# Altium PCB PCB2.PcbDoc
Units mil, origin at the board's own origin, x right, y up, seen from the top; angles counter-clockwise.
Board outline 6000 x 4000 mil, 2 copper layers (Top Layer, Bottom Layer); 47 components, 44 nets, 205 pads, 0 vias.
Unrouted connection lines stored in the file: 122.
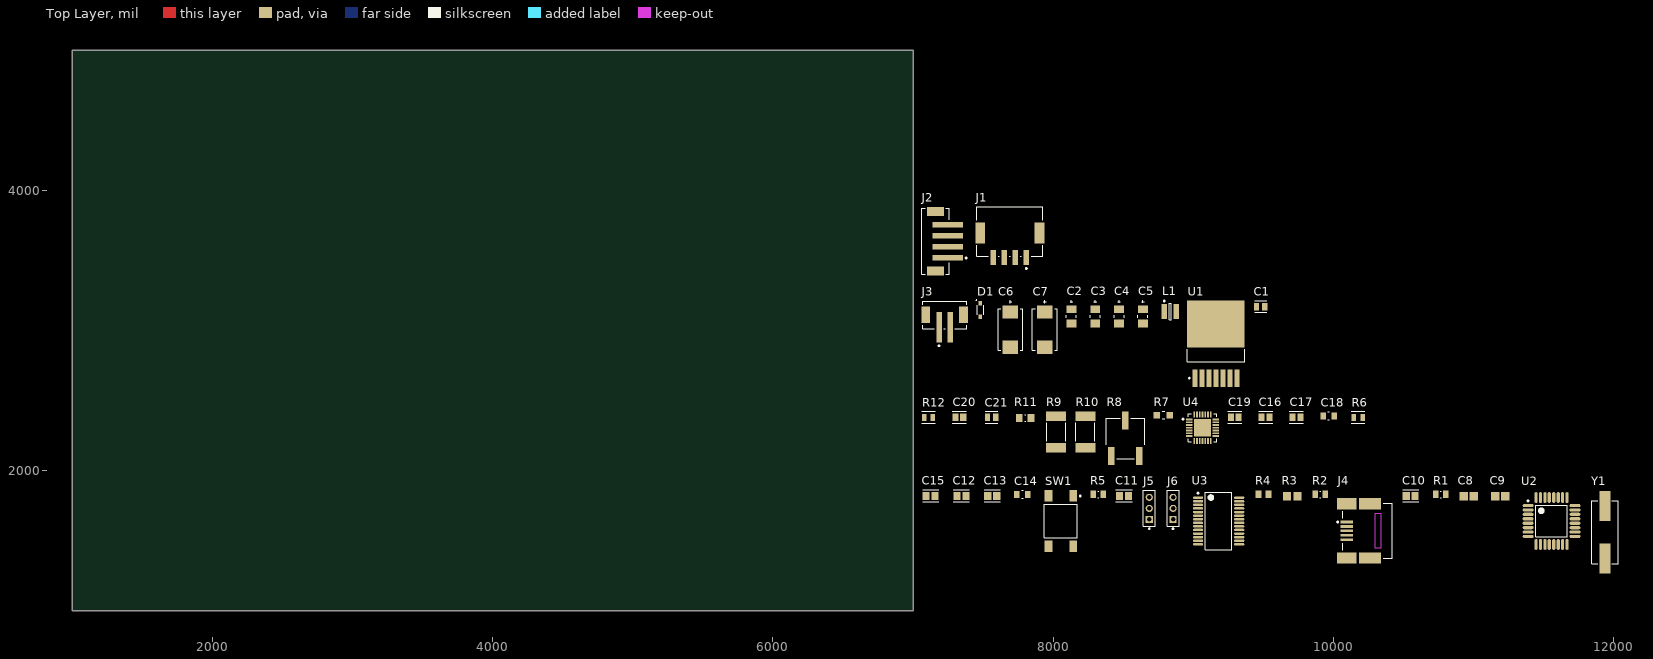
[diagram p0: Top Layer view]
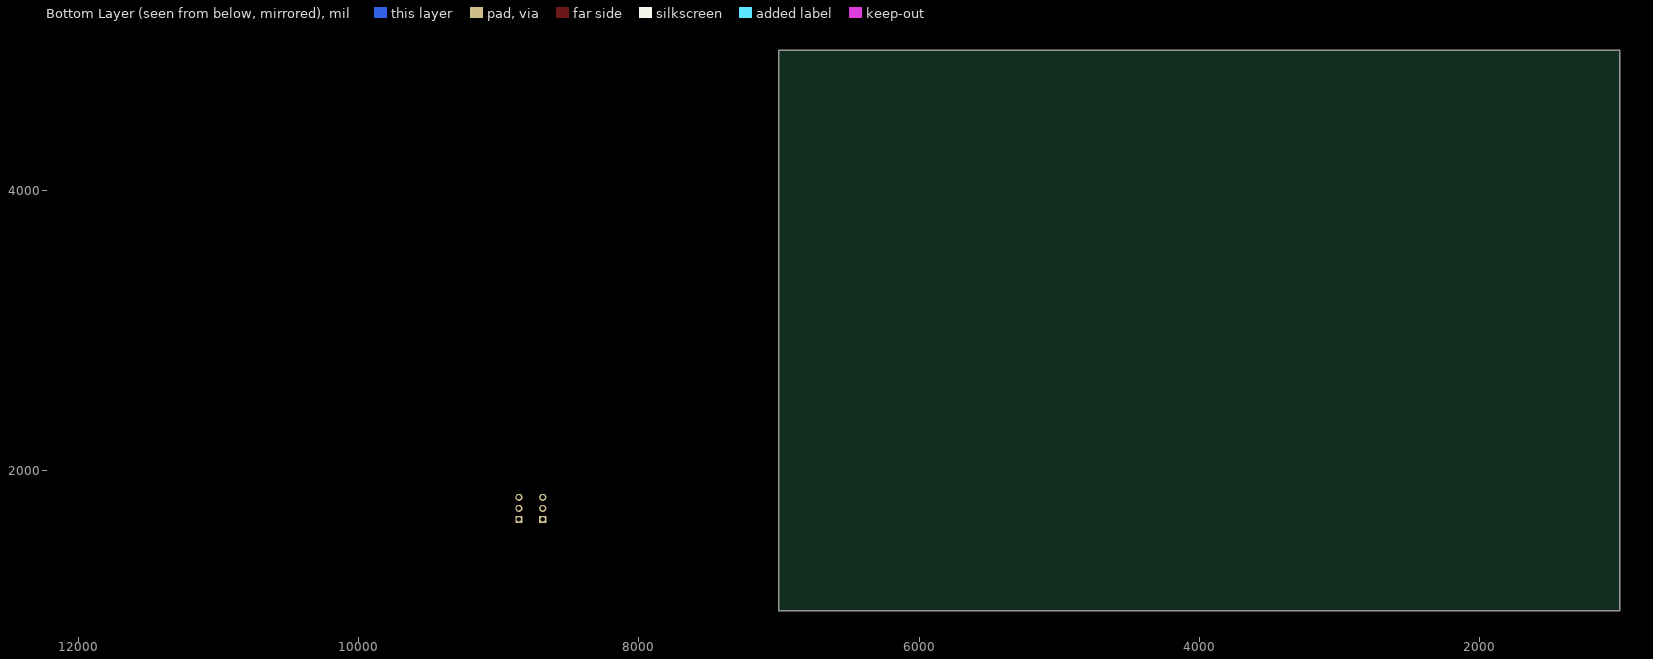
[diagram p1: Bottom Layer view, seen from below]

## Layer stack, top to bottom
Top Solder: solder mask 0.4, Solder Resist, Dk 3.5
Top Layer: signal copper 1.4
Dielectric 1: dielectric 12.6, FR-4, Dk 4.8
Bottom Layer: signal copper 1.4
Bottom Solder: solder mask 0.4, Solder Resist, Dk 3.5

## Board outline
1000,1000 7000,1000 7000,5000 1000,5000

## Design rules (kind name [scope] priority, off if disabled: settings)
Clearance [All] p1: gap=10 ignorepadtopadclearanceinfootprint=FALSE
PolygonConnect [All] p1: connectstyle=Relief reliefconductorwidth=10 reliefentries=4 polygonreliefangle="90 Angle" airgapwidth=10
RoutingVias [All] p1: holewidth=28 width=50 viastyle="Through Hole" minholewidth=28 minwidth=50 maxholewidth=28 maxwidth=50
SolderMaskExpansion [All] p1: expansion=4 istentingtop=FALSE
Width [All] p1: maxlimit=10 minlimit=10 preferedwidth=10
30 further rules are at their usual default settings.

## Classes and differential pairs
component class TOP: J1 J2
component class Designator: C1 C2 C3 C4 C5 C6 C7 D1 J3 L1 U1

## Components (designator, comment, footprint, x,y, rotation, side; value= is the part's Value field where it differs from the comment)
C1 "C0805C103K1RACTU" FP-C0805C-DN-MFG 9480,3170 r0 top value="10,000 pF"
C2 "TAJS156K006RNJ" FP-TAJS-MFG 8130,3100 r90 top
C3 "TAJS156K006RNJ" FP-TAJS-MFG 8300,3100 r90 top
C4 "TAJS156K006RNJ" FP-TAJS-MFG 8470,3100 r90 top
C5 "TAJS156K006RNJ" FP-TAJS-MFG 8640,3100 r90 top
C6 "EEFSX0D181ER" FP-SP-Cap-X-MFG 7695,3005 r90 top
C7 "EEFSX0D181ER" FP-SP-Cap-X-MFG 7940,3005 r90 top
C8 "08052U180GAT2A" CAPC2013X115X51ML20T26 10965,1815 r0 top value=18pF
C9 "08052U180GAT2A" CAPC2013X115X51ML20T26 11190,1815 r0 top value=18pF
C10 "08051C104KAT2A" FP-0805-L_2_01_0_2-W_1_25-IPC_B 10550,1820 r0 top
C11 "08051C104KAT2A" FP-0805-L_2_01_0_2-W_1_25-IPC_B 8505,1820 r0 top
C12 "08051C104KAT2A" FP-0805-L_2_01_0_2-W_1_25-IPC_B 7345,1820 r0 top
C13 "08051C104KAT2A" FP-0805-L_2_01_0_2-W_1_25-IPC_B 7565,1820 r0 top
C14 "0805YC475KAT2A" FP-0805-L_2_01_0_2-W_1_25-MFG 7780,1830 r0 top
C15 "08051C104KAT2A" FP-0805-L_2_01_0_2-W_1_25-IPC_B 7125,1820 r0 top
C16 "08055C104KAT2A" FP-0805-L_2_01_0_2-W_1_25-IPC_C 9515,2380 r0 top
C17 "08055C104KAT2A" FP-0805-L_2_01_0_2-W_1_25-IPC_C 9735,2380 r0 top
C18 "0805YC475KAT2A" FP-0805-L_2_01_0_2-W_1_25-MFG 9965,2390 r0 top
C19 "08055C104KAT2A" FP-0805-L_2_01_0_2-W_1_25-IPC_C 9295,2380 r0 top
C20 "08055C104KAT2A" FP-0805-L_2_01_0_2-W_1_25-IPC_C 7330,2380 r0 top
C21 "C0805C224K5RACTU" FP-C0805C-DN-MFG 7560,2380 r0 top value="0.22 μF"
D1 "BAS3010B-03W" INF-SOD323_V 7480,3145 r0 top
J1 "SM04B-PASS-TBT(LF)(SN)" FP-SM04B-PASS-TBT_LF_SN-MFG 7690,3705 r0 top
J2 "B4B-PH-SM4-TBT(LF)(SN)" FP-B4B-PH-SM4-TBT_LF_SN-MFG 7160,3635 r90 top
J3 "B2B-PH-SM4-TBT(LF)(SN)" FP-B2B-PH-SM4-TBT_LF_SN-MFG 7225,3110 r0 top
J4 "56579-0576" MOLX-56579-0576_V 10095,1570 r90 top
J5 "NRPN031PAEN-RC" FP-NRPN031PAEN-RC-MFG 8685,1730 r90 top
J6 "NRPN031PAEN-RC" FP-NRPN031PAEN-RC-MFG 8855,1730 r90 top
L1 "SRN3015-220M" BOUR-SRN3015-2_V 8835,3135 r0 top
R1 "RT0805BRD071KL" RESC2013X60X35NL10T20 10765,1830 r0 top value=1K
R2 "RT0805BRD071KL" RESC2013X60X35NL10T20 9905,1830 r0 top value=1K
R3 "ERA6AEB472V" RESC2013X60X40ML20T25 9705,1815 r0 top value=4.7K
R4 "CRCW080510K0FKEAHP" RESC2013X60X40NL15T20 9500,1830 r0 top value=10K
R5 "RT0805BRD071KL" RESC2013X60X35NL10T20 8320,1830 r0 top value=1K
R6 "RC0805FR-07100KL" FP-RC0805-0_6-IPC_C 10175,2380 r0 top
R7 "ERA6AEB203V" FP-ERA6A-MFG 8785,2395 r0 top
R8 "3361P-1-103GLF" FP-3361P-MFG 8515,2230 r0 top
R9 "WSL2512R0500FEA" FP-WSL2512-MFG 8020,2275 r90 top value=50mΩ
R10 "WSL2512R0500FEA" FP-WSL2512-MFG 8230,2275 r90 top value=50mΩ
R11 "CRCW080510K0FKEA" FP-CRCW0805-e3-IPC_A 7800,2375 r0 top
R12 "RC0805FR-07100KL" FP-RC0805-0_6-IPC_C 7110,2380 r0 top
SW1 "FSM4JSMATR" TECO-FSM4JSMATR_V 8055,1640 r0 top
U1 "LM2678S-5.0/NOPB" KTW0007B_L 9160,2905 r90 top
U2 "ATmega328P-AU" 32A_M 11555,1640 r0 top
U3 "FT232RL" FTDI-SSOP-28_M 9180,1640 r0 top
U4 "A4988SETTR-T" FP-ET-28-MFG 9065,2305 r0 top
Y1 "ECS-160-S-5PX-TR" XTAL_ECS-160-S-5PX-TR 11935,1560 r90 top value=16MHz

## Footprints (in the part's own frame and the unit in brackets; to place one, negate y for a bottom-side part, rotate by r counter-clockwise, add the part's x,y. Pads: shape width x height; smd on the part's side, far side on the other; paste and mask are expansions set on the pad)
32A_M [mm] "Thin QFP, 32-Leads, Body 7x7mm, Pitch 0.8mm, IPC Low Density"
  oval 1.95x0.6 smd: 1(-4.25,2.8) 2(-4.25,2) 3(-4.25,1.2) 4(-4.25,0.4) 5(-4.25,-0.4) 6(-4.25,-1.2) 7(-4.25,-2) 8(-4.25,-2.8) 17(4.25,-2.8) 18(4.25,-2) 19(4.25,-1.2) 20(4.25,-0.4) 21(4.25,0.4) 22(4.25,1.2) 23(4.25,2) 24(4.25,2.8)
  oval 0.6x1.95 smd: 9(-2.8,-4.25) 10(-2,-4.25) 11(-1.2,-4.25) 12(-0.4,-4.25) 13(0.4,-4.25) 14(1.2,-4.25) 15(2,-4.25) 16(2.8,-4.25) 25(2.8,4.25) 26(2,4.25) 27(1.2,4.25) 28(0.4,4.25) 29(-0.4,4.25) 30(-1.2,4.25) 31(-2,4.25) 32(-2.8,4.25)
  silkscreen extent -4.37,-2.85 2.85,3.77, body extent -3.5,-3.5 3.5,3.5, height 1.2
BOUR-SRN3015-2_V [mm] "SMD, 2-Leads, Body 3x3mm, Height 1.5mm"
  rect 1x2.7 smd: 1(-1.1,0) 2(1.1,0)
  silkscreen extent -1.22,-1.5 0.2,2.02, body extent -1.5,-1.5 1.5,1.5, height 1.5
CAPC2013X115X51ML20T26 [mm] "Chip Capacitor, 2-Leads, Body 2.01x1.25mm, IPC Low Density"
  rect 1.55x1.55 smd: 1(-0.9,0) 2(0.9,0)
  body extent -1.11,-0.72 1.1,0.72, height 1.15
FP-0805-L_2_01_0_2-W_1_25-IPC_B [mil]
  rect 51.36x57.33 smd paste+0 mask+0: 1(-31.72,0) 2(31.72,0)
  silkscreen extent -57,-44 57,44, body extent -67,-39 67,39, height 10
FP-0805-L_2_01_0_2-W_1_25-IPC_C [mil]
  rect 43.49x53.39 smd paste+0 mask+0: 1(-27.79,0) 2(27.79,0)
  silkscreen extent -50,-44 50,44, body extent -53,-32 53,32, height 10
FP-0805-L_2_01_0_2-W_1_25-MFG [mm]
  rect 1x1.25 smd paste+0 mask+0: 1(-1,0) 2(1,0)
  silkscreen extent -0.13,-0.72 0.13,0.72, body extent -1.6,-0.82 1.6,0.82, height 0.25
FP-3361P-MFG [mm]
  rect 1.19x3.3 smd paste+0 mask+0: 1(-2.54,-3.2) 2(0,3.2) 3(2.54,-3.2)
  silkscreen extent -3.48,-3.69 3.48,3.6, body extent -3.58,-4.95 3.58,4.95, height 0.25
FP-B2B-PH-SM4-TBT_LF_SN-MFG [mm]
  rect 1x5.5 smd paste+0 mask+0: 1(-1,-2.25) 2(1,-2.25)
  rect 1.6x3 smd paste+0 mask+0: 3(-3.4,0) 4(3.4,0)
  silkscreen extent -3.98,-5.7 3.98,2.5, body extent -4.3,-5.1 4.3,2.6, height 0.25
FP-B4B-PH-SM4-TBT_LF_SN-MFG [mm]
  rect 1x5.5 smd paste+0 mask+0: 1(-3,-2.25) 2(-1,-2.25) 3(1,-2.25) 4(3,-2.25)
  rect 1.6x3 smd paste+0 mask+0: 5(-5.4,0) 6(5.4,0)
  silkscreen extent -5.97,-5.68 5.97,2.5, body extent -6.3,-5.1 6.3,2.6, height 0.25
FP-C0805C-DN-MFG [mm]
  rect 0.95x1.35 smd paste+0 mask+0: 1(-0.75,0) 2(0.75,0)
  silkscreen extent -1.1,-1.07 1.1,1.07, body extent -1.4,-0.85 1.4,0.85, height 0.25
FP-CRCW0805-e3-IPC_A [mil]
  rect 47.5x59.38 smd paste+0 mask+0: 1(-41.37,0) 2(41.37,0)
  silkscreen extent -3,-25 3,25, body extent -85,-49 85,49, height 10
FP-ERA6A-MFG [mm]
  rect 1.15x1.15 smd paste+0 mask+0: 1(-1.175,0) 2(1.175,0)
  silkscreen extent -0.23,-0.67 0.23,0.67, body extent -1.85,-0.77 1.85,0.77, height 0.25
FP-ET-28-MFG [mm]
  rect 1.15x0.3 smd paste+0 mask+0: 1(-2.4,1.5) 2(-2.4,1) 3(-2.4,0.5) 4(-2.4,0) 5(-2.4,-0.5) 6(-2.4,-1) 7(-2.4,-1.5) 15(2.4,-1.5) 16(2.4,-1) 17(2.4,-0.5) 18(2.4,0) 19(2.4,0.5) 20(2.4,1) 21(2.4,1.5)
  rect 0.3x1.15 smd paste+0 mask+0: 8(-1.5,-2.4) 9(-1,-2.4) 10(-0.5,-2.4) 11(0,-2.4) 12(0.5,-2.4) 13(1,-2.4) 14(1.5,-2.4) 22(1.5,2.4) 23(1,2.4) 24(0.5,2.4) 25(0,2.4) 26(-0.5,2.4) 27(-1,2.4) 28(-1.5,2.4)
  rect 3.15x3.15 smd paste+0 mask+0: 29(0,0)
  silkscreen extent -3.67,-2.58 2.58,2.57
FP-NRPN031PAEN-RC-MFG [mm]
  rect 1.3x1.3 hole 0.8 paste-2539.97 mask+0: 1(-2,0)
  round 1.3 hole 0.8 paste-2539.97 mask+0: 2(0,0) 3(2,0)
  silkscreen extent -3.8,-1.1 3.25,1.1, body extent -3.35,-1.2 3.35,1.2, height 0.25
FP-RC0805-0_6-IPC_C [mil]
  rect 31.82x49.69 smd paste+0 mask+0: 1(-31.57,0) 2(31.57,0)
  silkscreen extent -47,-42 47,42, body extent -51,-31 51,31, height 10
FP-SM04B-PASS-TBT_LF_SN-MFG [mm]
  rect 1x2.7 smd paste+0 mask+0: 1(3,-4.7) 2(1,-4.7) 3(-1,-4.7) 4(-3,-4.7)
  rect 1.8x3.8 smd paste+0 mask+0: 5(-5.35,-0.25) 6(5.35,-0.25)
  silkscreen extent -6,-6.82 6,4.45, body extent -6.35,-6.15 6.35,4.55, height 0.25
FP-SP-Cap-X-MFG [mm]
  rect 2.4x2.8 smd paste+0 mask+0: 1(-3.2,0) 2(3.2,0)
  silkscreen extent -3.75,-2.25 5.3,2.25, body extent -4.5,-2.35 4.5,2.35, height 0.25
FP-TAJS-MFG [mm]
  rect 1.4x1.8 smd paste+0 mask+0: 1(-1.3,0) 2(1.3,0)
  silkscreen extent -0.23,-0.9 2.93,0.9, body extent -2.1,-1 2.1,1, height 0.25
FP-WSL2512-MFG [mm]
  rect 1.65x3.68 smd paste+0 mask+0: 1(-2.855,0) 2(2.855,0)
  silkscreen extent -1.66,-1.72 1.66,1.72, body extent -3.78,-1.94 3.78,1.94, height 0.25
FTDI-SSOP-28_M [mm] "SOP, 28-Leads, Body 10.5x5.6mm, Pitch 0.65mm, IPC Low Density"
  oval 1.85x0.45 smd: 1(-3.725,4.225) 2(-3.725,3.575) 3(-3.725,2.925) 4(-3.725,2.275) 5(-3.725,1.625) 6(-3.725,0.975) 7(-3.725,0.325) 8(-3.725,-0.325) 9(-3.725,-0.975) 10(-3.725,-1.625) 11(-3.725,-2.275) 12(-3.725,-2.925) 13(-3.725,-3.575) 14(-3.725,-4.225) 15(3.725,-4.225) 16(3.725,-3.575) 17(3.725,-2.925) 18(3.725,-2.275) 19(3.725,-1.625) 20(3.725,-0.975) 21(3.725,-0.325) 22(3.725,0.325) 23(3.725,0.975) 24(3.725,1.625) 25(3.725,2.275) 26(3.725,2.925) 27(3.725,3.575) 28(3.725,4.225)
  silkscreen extent -3.85,-5.25 2.4,5.25, body extent -3.9,-5.25 3.9,5.25, height 2
INF-SOD323_V [mm] "SOD, 2-Leads, Body 1.7x1.25 mm"
  rect 0.6x0.8 smd: 1(0,1.25) 2(0,-1.25)
  silkscreen extent -0.76,-0.85 0.6,1.83, body extent -0.63,-0.85 0.63,0.85, height 1.1
KTW0007B_L [mm] "DPAK, 7-Leads, Body 9.4x10.4mm, Pitch 1.27mm, IPC High Density"
  rrect11% 3.2x0.9 smd: 1(-6.25,3.81) 2(-6.25,2.54) 3(-6.25,1.27) 4(-6.25,0) 5(-6.25,-1.27) 6(-6.25,-2.54) 7(-6.25,-3.81)
  rrect1% 8.5x10.45 smd: 8(3.6,0)
  silkscreen extent -6.37,-5.2 -1.05,5.2, body extent -3.3,-5.2 6.1,5.2, height 4.65
MOLX-56579-0576_V [mm] "SMD, 5-Leads, body 9.9x9mm, Pitch 0.8mm"
  rect 0.5x2.25 smd: 1(1.6,0) 2(0.8,0) 3(0,0) 4(-0.8,0) 5(-1.6,0)
  rect 2.05x3.5 smd: 6(4.925,0.025) 7(-4.925,0.025)
  rect 2.05x4 smd: 8(4.925,-4.225) 9(-4.925,-4.225)
  Top Layer keep-out region: -3.1,-6.25 3.1,-6.25 3.1,-5.05 -3.1,-5.05
  silkscreen extent -4.95,-8.25 4.95,1.8, body extent -4.95,-8.25 4.95,0.75, height 3.93
RESC2013X60X35NL10T20 [mm] "Chip Resistor, 2-Leads, Body 2.00x1.25mm, IPC Medium Density"
  rect 1x1.35 smd: 1(-0.9,0) 2(0.9,0)
  silkscreen extent -0.1,-0.58 0.1,0.58, body extent -1.05,-0.67 1.05,0.67, height 0.6
RESC2013X60X40ML20T25 [mm] "Chip Resistor, 2-Leads, Body 2.00x1.25mm, IPC Low Density"
  rect 1.4x1.55 smd: 1(-0.95,0) 2(0.95,0)
  body extent -1.1,-0.72 1.1,0.72, height 0.6
RESC2013X60X40NL15T20 [mm] "Chip Resistor, 2-Leads, Body 2.00x1.25mm, IPC Medium Density"
  rect 1.1x1.4 smd: 1(-0.875,0) 2(0.875,0)
  body extent -1.07,-0.7 1.08,0.7, height 0.6
TECO-FSM4JSMATR_V [mm] "SMD, 4-Leads, Body 6x6mm, Pitch 4.5mm"
  rect 1.4x2.1 smd: 1(2.25,4.55) 2(2.25,-4.55) 3(-2.25,4.55) 4(-2.25,-4.55)
  silkscreen extent -3,-3 3.63,4.67, body extent -3,-5 3,5, height 5.08
XTAL_ECS-160-S-5PX-TR [mm]
  rect 5.5x2 smd: 1(-4.75,0) 2(4.75,0)
  silkscreen extent -5.7,-2.4 5.7,2.4

## Part data
C1: library part CMP-03020-018902-1, "CAP CER 10000PF 100V X7R 0805", Capacitance="10,000 pF", Manufacturer=KEMET, Package=C0805C-DN, Temperature="-55°C to +125°C", Temperature Characteristic=X7R, Temperature Coefficient=30ppm/°C, Temperature Range High=+125°C, Temperature Range Low=-55°C, Tolerance=0.1, Voltage Rating="100 V", Automotive=No, Category=Cap, ComponentLink2Description=Datasheet, ComponentLink2URL=https://content.kemet.com/datasheets/KEM_C1003_C0G_SMD.pdf, Device Class L1="Passive Components", Device Class L2=Capacitors, Device Class L3="Ceramic Capacitors", Digikey Description="CAP CER 10000PF 100V X7R 0805", Height=0.88mm, Ipc Land Pattern Name=CAPC200125X78, Lead Free=Yes, Manufacturer Part Number=C0805C103K1RACTU, Material=Ceramic, Mouser Description="Cap Ceramic 0.01uF 100V X7R 10% SMD 0805 125°C Paper T/R", Octopart=https://octopart.com/c0805c103k1ractu-kemet-97824, RoHS=TRUE
C2 C3 C4 C5: library part CMP-04424-000383-1, "15uF 6.3V  ±10% 3.5Ω 1206  SMD Tantalum Capacitor", Capacitance=15uF, Case Code (Imperial)=1206, Case Code (Metric)=3216, Dielectric Material=Tantalum, ESR (Equivalent Series Resistance)=4R, Leakage Current=900nA, Max Operating Temperature=125°C, Min Operating Temperature=-55°C, Package Quantity=1, Tolerance=10%, Voltage=6.3V, Case/Package=1206, Construction=Flat, Depth=1.6mm, Dissipation Factor=8%, Features="General Purpose", Height=1.2mm, Height - Seated (Max)=0.047inch, Lead Free="Lead Free", Length=3.2mm, Mount="Surface Mount", Number of Pins=2, Packaging="Tape and Reel", Polarity=Polar, Radiation Hardening=No, Resistance=4R, RoHS Compliant=Yes, Series=TAJ, Termination=SMD/SMT, Voltage Rating=6.3V, Voltage Rating (DC)=6.3V, Weight=0.000571oz, Width=0.063inch
C6 C7: library part CMP-05428-000369-1, "Molded Aluminum Polymer Capacitor 180uF 20% 2V life 2000Hours SMD 2917", Capacitance=180uF, Case Code (Imperial)=2917, Case Code (Metric)=7343, Dielectric Material=Aluminium, ESR (Equivalent Series Resistance)=9mR, Leakage Current=36uA, Max Operating Temperature=105°C, Min Operating Temperature=-40°C, Package Quantity=3500, Ripple Current=3A, Tolerance=20%, Voltage=2V, Case/Package=2917, Construction=Flat, Depth=4.3mm, Dissipation Factor=0.06%, Height=1.9mm, Height - Seated (Max)=0.083inch, Length=7.3mm, Life (Hours)=1000Hour, Mount="Surface Mount", Number of Pins=2, Packaging="Tape and Reel", Ripple Current (AC)=3A, RoHS Compliant=Yes, Series="SP-Cap SX", Termination=SMD/SMT, Voltage Rating=2V, Voltage Rating (DC)=2V, Width=4.3mm
C8 C9: library part CMP-2007-04887-1, Manufacturer="AVX Interconnect / Elco", Part Number=08052U180GAT2A
C10 C11 C12 C13 C15: library part CMP-2007-04174-2, "General Purpose Ceramic Capacitor, 0805, 100nF, 10%, X7R, 15%, 100V", Capacitance=100nF, Case Code (Imperial)=0805, Case Code (Metric)=2012, Dielectric=X7R, Dielectric Material=Ceramic, Max Operating Temperature=125°C, Min Operating Temperature=-55°C, Package Quantity=2000, Tolerance=10%, Voltage=100V, Case/Package=0805, Construction=Flat, Contact Plating=Tin, Depth=1.25mm, Height=1.4mm, Lead Free="Lead Free", Length=2.01mm, Mount="Surface Mount", Number of Pins=2, Packaging="Tape and Reel", Radiation Hardening=No, REACH SVHC="No SVHC", RoHS Compliant=Yes, Series=-, Termination=SMD/SMT, Thickness=0.055inch, Voltage Rating=100V, Voltage Rating (DC)=100V, Width=0.049inch
C14 C18: library part CMP-2007-04518-2, "General Purpose Ceramic Capacitor, 0805, 4.7uF, 10%, X7R, 15%, 16V", Capacitance=4.7uF, Case Code (Imperial)=0805, Case Code (Metric)=2012, Dielectric=X7R, Max Operating Temperature=125°C, Min Operating Temperature=-55°C, Package Quantity=1, Tolerance=10%, Voltage=10V, Voltage Rating=16V, Case/Package=0805, Construction=Flat, Contact Plating=Tin, Depth=1.25mm, Dissipation Factor=3.5%, Height=1.52mm, Lead Free="Lead Free", Length=2.01mm, Mount="Surface Mount", Number of Pins=2, Packaging="Tape and Reel", Radiation Hardening=No, REACH SVHC="No SVHC", RoHS Compliant=Yes, Series=-, Termination=SMD/SMT, Thickness=0.06inch, Voltage Rating (DC)=16V, Width=0.049inch
C16 C17 C19 C20: library part CMP-2000-05016-2, "General Purpose Ceramic Capacitor, 0805, 100nF, 10%, X7R, 0.15, 50V", Capacitance=100nF, Case Code (Imperial)=0805, Case Code (Metric)=2012, Dielectric=X7R, Dielectric Material=Ceramic, Insulation Resistance=100GR, Max Operating Temperature=125°C, Min Operating Temperature=-55°C, Package Quantity=4000, Tolerance=10%, Voltage=50V, Case/Package=0805, Depth=1.25mm, Dissipation Factor=2.5%, Height=0.5mm, Lead Free="Lead Free", Length=2mm, Mount="Surface Mount", Number of Pins=2, Packaging="Cut Tape", Radiation Hardening=No, REACH SVHC="No SVHC", RoHS Compliant=Yes, Series="MLCC X7R", Termination=Standard, Thickness=0.037inch, Voltage Rating=50V, Voltage Rating (DC)=50V, Weight=0.001411oz, Width=1.2mm
C21: library part CMP-1036-04552-2, "CAP CER 0.22UF 50V X7R 0805", Capacitance="0.22 μF", Manufacturer=KEMET, Package=C0805C-DN, Temperature="-55°C to +125°C", Temperature Characteristic=X7R, Temperature Coefficient=30ppm/°C, Temperature Range High=+125°C, Temperature Range Low=-55°C, Tolerance=0.1, Voltage Rating="50 V", Automotive=No, Category=Cap, ComponentLink2Description=Datasheet, ComponentLink2URL=https://content.kemet.com/datasheets/KEM_C1003_C0G_SMD.pdf, Device Class L1="Passive Components", Device Class L2=Capacitors, Device Class L3="Ceramic Capacitors", Digikey Description="CAP CER 0.22UF 50V X7R 0805", Height=0.88mm, Ipc Land Pattern Name=CAPC200125X78, Lead Free=Yes, Manufacturer Part Number=C0805C224K5RACTU, Material=Ceramic, Mouser Description="CAP CER 0.22UF 50V X7R 0805", Octopart=https://octopart.com/c0805c224k5ractu-kemet-144670, RoHS=TRUE
D1: library part CMP-1183-00005-1, "Medium Power AF Schottky Diode, -65 to 125 degC, SOD323, Reel, Green", Manufacturer=Infineon, ComponentLink1Description="Manufacturer URL", ComponentLink1URL=http://www.infineon.com/, ComponentLink2Description=Datasheet, ComponentLink2URL=http://www.infineon.com/dgdl/bas3010bseries.pdf?folderId=db3a304313d846880113def5812204a1&fileId=db3a304313e278750113e29a03a70005, ComponentLink3Description="Package Specification", ComponentLink3URL=http://www.infineon.com/dgdl/SOD323-Package_Overview.pdf?folderId=db3a30431936bc4b011952aab84f3bbe&fileId=db3a30431936bc4b011952beed653be3, Configuration=Single, CT (max)="40Â pF", Green=TRUE, IF (max)="1,000Â mA", Model="schottky diode", Mounting Technology="Surface Mount", PackageDescription="2-Pin Small Outline Diode Package, 1.25 x 1.7 mm Body", PackageReference=SOD323, Packing=Reel, PartNumber=BAS3010B-03W, VF (max)="550Â mV", VR (max)="30Â V"
J1: library part CMP-2000-07078-2, "CONN HEADER SMD R/A 4POS 2MM", Current Rating=3A, Manufacturer=JST, Temperature="-25°C to +85°C", Temperature Range High=+85°C, Temperature Range Low=-25°C, Voltage Rating=250V, Automotive=No, Category=Conn, ComponentLink2Description=Datasheet, ComponentLink2URL=http://www.jst-mfg.com/product/pdf/eng/ePA-F.pdf, Conn Gender=Male, Conn Orientation="Right Angle", Contact Material=Tin, Device Class L1=Connectors, Device Class L2="Headers and Wire Housings", Device Class L3=unset, Digikey Description="CONN HEADER SMD R/A 4POS 2MM", Height=5.7mm, Lead Free=Yes, Manufacturer Part Number=SM04B-PASS-TBT(LF)(SN), Number Of Contacts=4, Number Of Rows=1, Octopart=https://octopart.com/sm04b-pass-tbt%28lf%29%28sn%29-jst-3990422, Package=SM04B-PASS-TBT(LF)(SN), Pitch=2mm, RoHS=TRUE
J2: library part CMP-17439-000271-1, "CONN HEADER SMD 4POS 2MM", Color=Natural, Contact Resistance=20mR, Flammability Rating="UL94 V-0", Housing Color=Beige, Max Current Rating=2A, Max Operating Temperature=85°C, Max Voltage Rating (AC)=100V, Min Operating Temperature=-25°C, Package Quantity=1, Connector Type=Header, Contact Finish - Mating=TIN, Contact Material="Copper Alloy", Contact Mating Length=0.13inch, Contact Plating=Copper, Contact Shape=Square, Contact Type="Male Pin", Depth=5mm, Fastening Type=Detent, Housing Material=Polyamide, Insulation Color=Natural, Insulation Material=Nylon, Lead Free="Lead Free", Length=11.95mm, Mated Stacking Heights=8.6mm, Model=JST, Mount="Surface Mount", Number of Positions=4, Number Of Rows=1, Orientation=Straight, Packaging="Tape and Reel", Pitch=2mm, Series=PH, Termination=Solder, Voltage Rating=100V
J3: library part CMP-17439-000005-1, "CONN HEADER SMD 2POS 2MM", Current Rating=2A, Manufacturer=JST, Package=0, Temperature="-25°C to +85°C", Temperature Range High=+85°C, Temperature Range Low=-25°C, Voltage Rating=100V, Automotive=No, Category=Conn, ComponentLink2Description=Datasheet, ComponentLink2URL=http://www.jst-mfg.com/product/pdf/eng/ePH.pdf, Conn Gender=Male, Conn Orientation=Vertical, Contact Material=Tin,Copper, Device Class L1=Connectors, Device Class L2="Headers and Wire Housings", Device Class L3=unset, Digikey Description="CONN HEADER SMD 2POS 2MM", Height=6.65mm, Lead Free=Yes, Manufacturer Part Number=B2B-PH-SM4-TBT(LF)(SN), Number Of Contacts=2, Number Of Rows=1, Octopart=https://octopart.com/b2b-ph-sm4-tbt%28lf%29%28sn%29-jst-7877930, Pitch=2mm, RoHS=TRUE
J4: library part CMP-2000-05643-1, "USB Connector, 30 V, 1 A, 0 to 50 degC, 5-Pin SMD, RoHS, Tape and Reel", Color=Gray, Current Rating=1A, Flammability Rating=UL94V-0, Insulation Resistance=100MOhms, Manufacturer=Molex, Operating Temperature Range=0Cto+50C, Package Description="5-Pin Surface Mount Device, Body 9.9 x 9 mm, Pitch 0.8 mm", Voltage Rating=30VAC/DC, Brand=Molex, Connector Type=MiniUSBTypeABReceptacle, Contact Material=CopperAlloy, Contact Plating=Gold, Datasheet URL=http://www.molex.com/pdm_docs/sd/565790576_sd.pdf, Datasheet Version="Rev. E, 04/2006", Factory Pack Quantity=800, Features=MetalshieldingforESDprotection, Gender=Female, Manufacturer URL=http://www.molex.com/, Model=USB, Mounting Angle=Right, Mounting Technology=SurfaceMount, Number Of Contacts=5Contact, Number of Ports=1Port, Package Reference=56579-0576, Packaging=Reel, Product=MiniUSBTypeABConnectors, Product Category=USBConnectors, RoHS=Details, Series=56579, Standard=USB, Termination Style=SolderTab
J5 J6: library part CMP-25680-000021-1, "CONN HEADER VERT 3POS 2MM", Current Rating=2A, Manufacturer=Sullins, Package=0, Temperature="-40°C to +105°C", Temperature Range High=+105°C, Temperature Range Low=-40°C, Voltage Rating=150V, Automotive=No, Category=Conn, ComponentLink2Description=Datasheet, ComponentLink2URL=https://drawings-pdf.s3.amazonaws.com/10531.pdf, Conn Gender=Male, Conn Orientation=Straight, Contact Material=Gold,Nickel, Device Class L1=Connectors, Device Class L2="Headers and Wire Housings", Device Class L3=unset, Digikey Description="CONN HEADER VERT 3POS 2MM", Height=6mm, Lead Free=Yes, Manufacturer Part Number=NRPN031PAEN-RC, Number Of Contacts=3, Number Of Rows=1, Octopart=https://octopart.com/nrpn031paen-rc-sullins-12817732, Pitch=2mm, RoHS=TRUE
L1: library part CMP-0007-00013-1, "Semi-shielded Power Inductor, 22 uH, +/- 20%, 0.6 A, -40 to 125 degC, 3 x 3 x 1.5 mm SMD, RoHS and Halogen Free, Tape and Reel", Inductance="22 uH", Inductance tolerance="+/- 20%", Manufacturer=Bourns, Operating Temperature="-40 to 125 degC", Rated current="0.6 A", Resistance to Solder Heat="+260 degC for 10 sec.", ComponentLink1Description="Manufacturer URL", ComponentLink1URL=http://www.bourns.com/, ComponentLink2Description=Datasheet, ComponentLink2URL=http://www.bourns.com/data/global/pdfs/SRN3015.pdf, ComponentLink3Description="Package Specification", ComponentLink3URL=http://www.bourns.com/data/global/pdfs/SRN3015.pdf, DatasheetVersion=Aug-11, DCR Max="0.622 Ohm", Isat="0.58 A", Model=Inductor, Mounting Technology="Surface Mount", PackageDescription="2-Pin SMD, Body 3 x 3 mm, Height 1.5 mm", PackageReference=SRN3015, Packing="Tape and Reel", PartNumber=SRN3015-220M, RoHS=TRUE, SRF Min="28 MHz"
R1 R2 R5: library part CMP-2001-01453-1, Manufacturer=Yageo, Part Number=RT0805BRD071KL
R3: library part CMP-2001-00644-1, Manufacturer=Panasonic, Part Number=ERA6AEB472V
R4: library part CMP-2001-04472-1, Manufacturer="Vishay Dale", Part Number=CRCW080510K0FKEAHP
R6 R12: library part CMP-2100-03668-5, "RES 100K OHM 1% 1/8W 0805", Case Code (Imperial)=0805, Case Code (Metric)=2012, Max Operating Temperature=155°C, Max Power Dissipation=125mW, Min Operating Temperature=-55°C, Package Quantity=1, Resistance=100kΩ, Resistance Tolerance=1%, Resistor Type="Thick Film", Temperature Coefficient=100ppm/°C, Voltage Rating=150V, Case/Package=0805, Construction=Rectangular, Depth=1.25mm, Features="Moisture Resistant", Height=0.024inch, Lead Free="Lead Free", Lead Pitch=0.4mm, Length=0.079inch, Military Standard=Not, Number of Pins=2, Number of Terminations=2, Packaging="Tape and Reel", Power Rating=125mW, RoHS Compliant=Yes, Series=RC, Size Code=0805, Technology="THICK FILM", Termination=SMD/SMT, Tolerance=1%, Voltage Rating (DC)=150V, Width=0.049inch
R7: library part CMP-2001-00610-2, "RES 20K OHM 0.1% 1/8W 0805", Case Code (Imperial)=0805, Case Code (Metric)=2012, Max Operating Temperature=155°C, Max Power Dissipation=125mW, Min Operating Temperature=-55°C, Package Quantity=1, Resistance=20kΩ, Resistance Tolerance=0.1%, Resistor Type="Thin Film", Temperature Coefficient=25ppm/°C, Voltage Rating=100V, Case/Package=0805, Construction=Rectangular, Contact Plating=Tin, Depth=1.25mm, Features="Automotive AEC-Q200", Height=0.5mm, Lead Free="Lead Free", Length=2mm, Military Standard=Not, Mount="Surface Mount", Number of Pins=2, Number of Terminations=2, Packaging="Tape and Reel", Power Rating=125mW, Radiation Hardening=No, REACH SVHC="No SVHC", RoHS Compliant=Yes, Series=ERA-6A, Size Code=0805, Technology="THIN FILM", Termination=SMD/SMT, Tolerance=0.1%, Voltage Rating (DC)=100V, Width=1.25mm
R8: library part CMP-07234-000045-1, "TRIMMER 10K OHM 0.5W GW TOP ADJ", Color=Natural, Max Operating Temperature=125°C, Max Power Dissipation=500mW, Min Operating Temperature=-55°C, Package Quantity=1, Resistance=10kR, Resistance Tolerance=10%, Resistor Type=Cermet, Temperature Coefficient=100ppm/°C, Voltage Rating=300V, Contact Plating=Tin, Depth=8.53mm, Height=0.205inch, Lead Free="Lead Free", Length=6.71mm, Military Standard=Not, Mount="Surface Mount", Number of Turns=1, Packaging="Tape and Reel", Power Rating=500mW, Radiation Hardening=No, REACH SVHC="No SVHC", RoHS Compliant=Yes, Series="Trimpot® 3361 - Sealed", Taper=Linear, Technology=CERMET, Termination="Gull Wing", Tolerance=10%, Voltage Rating (DC)=300V, Weight=0.567g, Width=0.264inch
R9 R10: library part CMP-2000-07420-2, "RES 0.05 OHM 1% 1W 2512", 3DS Part Number=110-00001, Manufacturer=Vishay, Package=WSL2512, Power Rating=1W, Resistance=50mΩ, Temperature="-65°C to +170°C", Temperature Coefficient=75ppm/°C, Temperature Range High=+170°C, Temperature Range Low=-65°C, Tolerance=1%, Automotive=Yes, Automotive Grade="Grade 0", Category=Res, ComponentLink2Description=Datasheet, ComponentLink2URL=http://www.vishay.com/docs/30100/wsl.pdf, Composition="Metal Element", Device Class L1="Passive Components", Device Class L2=Resistors, Device Class L3="Chip SMD Resistors", Digikey Description="RES 0.05 OHM 1% 1W 2512", Height=0.889mm, Ipc Land Pattern Name=RESC635318X64, Lead Free=Yes, Manufacturer Part Number=WSL2512R0500FEA, Octopart=https://octopart.com/wsl2512r0500fea-vishay-39744678, RoHS=TRUE, Series=WSL
R11: library part CMP-2001-04908-2, "RES Thick Film, 10kΩ, 1%, 0.125W, 100ppm/°C, 0805", Case Code (Imperial)=0805, Case Code (Metric)=2012, Max Operating Temperature=155°C, Min Operating Temperature=-55°C, Package Quantity=5000, Power Rating=125mW, Resistance=10kR, Temperature Coefficient=100ppm/°C, Tolerance=1%, Voltage Rating=150V, Case/Package=0805, Composition="Thick Film", Contact Plating=Tin, Depth=1.25mm, Height=0.45mm, Lead Free="Lead Free", Length=2mm, Military Standard=Not, Packaging="Tape and Reel", Radiation Hardening=No, Termination=SMD/SMT, Voltage Rating (DC)=150V, Weight=0.000194oz, Width=1.25mm
SW1: library part CMP-2000-07486-1, "Micro Miniature Push Button Switch FSM JSM, 50 mA, -35 to 85 degC, 4-Pin SMD, RoHS, Tape and Reel", Capacitance=0f, Case\/Package=SMD/SMT, Contact Current Rating=50mA, Contact Resistance=100mOhm, Manufacturer="TE Connectivity", Max Operating Temperature=85degC, Max Voltage Rating (DC)=12V, Min Operating Temperature=-35degC, Operating Force=160gf, Package Description="4-Pin Surface Mount Device, Body 6 x 6 mm, Pitch 4.5 mm", Package Quantity=1200, Voltage Rating (DC)=24V, Actuator Length=0.055inch, Actuator Material=Polyamide, Contact Material=CopperAlloy, Contact Plating=Silver, Current Rating=50mA, Datasheet URL=http://www.te.com/commerce/DocumentDelivery/DDEController?Action=showdoc&DocId=Customer+Drawing%7F2-1437565-7%7FV%7Fpdf%7FEnglish%7FENG_CD_2-1437565-7_V.pdf%7F4-1437565-2, Datasheet Version="Rev. V, 02/2015", Electrical Life=100000Cycles, Illumination Type=Illuminated, Manufacturer URL=http://www.te.com/, Mechanical Life=100000Cycles, Model=PushButton, Mount=SurfaceMount, Mounting Technology=SurfaceMount, Orientation=Straight, Package Reference=FSM4JSMATR, Packaging=TapeandReel, REACH SVHC=Unknown, RoHSCompliant=true, Switch Travel=0.25mm, Termination=GullWing, Throw Configuration=SPST
U1: library part CMP-0069-00189-3, "SIMPLE SWITCHER® High Efficiency 5A Step-Down Voltage Regulator, 7-pin TO-263, Pb-Free", Manufacturer="Texas Instruments", PackageTopMarking=NSUZXYTTE#*LM2678*S-5.0, PowerWise=N, Code_JEDEC=MO-169-AC, ComponentLink1Description="Datasheet URL", ComponentLink1URL=http://www.ti.com/general/docs/lit/getliterature.tsp?genericPartNumber=LM2678&fileType=pdf, CompType=Switcher, PackageDescription="TO-263, Molded, .400 x .390 x .180in Body, 7 Lead, .050in Pitch, Surface Mount", PackageReference=KTW0007B, PinCount=7, RoHS=Y
U2: library part CMP-0095-00269-2, "8-bit AVR Microcontroller, 32KB Flash, 1KB EEPROM, 2KB SRAM, 32-pin TQFP, Industrial Grade (-40°C to 85°C)", Code_JEDEC=MS-026-ABA, ComponentLink1Description="Manufacturer URL", ComponentLink1URL=http://www.atmel.com/, ComponentLink2Description="ATmega48A/48PA/88A/88PA/168A/168PA/328/328P Datasheet", ComponentLink2URL=http://www.atmel.com/dyn/resources/prod_documents/doc8271.pdf, ComponentLink3Description="ATmega48A/48PA/88A/88PA/168A/168PA/328/328P Summary", ComponentLink3URL=http://www.atmel.com/dyn/resources/prod_documents/8271S.pdf, DatasheetVersion="revD, May-2011", PackageDescription="32-Lead, 7x7x1.0 mm Body, 0.8mm Lead Pitch, Thin Profile Plastic Quad Flat Package (TQFP)", PackageReference=32A, PackageVersion="revC, Oct-2010", RevisionNote="DatasheetVersion & PackageVersion updated. URLs added."
U3: library part CMP-2000-05029-1, "IC USB FS SERIAL UART 28-SSOP", Manufacturer=FTDI, Maximum Operating Temperature=+85degC, Minimum Operating Temperature=-40degC, Package Type=SSOP, Datasheet URL=http://datasheet.octopart.com/FT232RL-FTDI-datasheet-120501.pdf, Datasheet Version="Rev. 1.04, 02/2006", Dimensions=10.2x5.3x1.75mm, Height=1.75mm, Length=10.2mm, Manufacturer URL=http://www.ftdichip.com/, Maximum Data Rate=3MBd, Mounting Type=SurfaceMount, Number of Channels per Chip=1, Pin Count=28, Receive FIFO=256B, Transmit FIFO=128B, Width=5.3mm
U4: library part CMP-1742-00003-2, "IC MTR DRVR BIPOLAR 3-5.5V 28QFN", Case/Package="QFN EP", Max Operating Temperature=85°C, Max Supply Voltage=35V, Min Operating Temperature=-20°C, Min Supply Voltage=8V, Output Current=2A, Package Quantity=1, Motor Type=Stepper, Mount="Surface Mount", Number of Outputs=1, Number of Pins=28, Output Voltage=35V, Packaging="Tape and Reel", Radiation Hardening=No, REACH SVHC="No SVHC"
Y1: "16MHz Â±30ppm Crystal Series 40 Ohms HC-49/US", Package="HC49/US ECS International", Availability=Unavailable, MF="ECS Inc.", MP=ECS-160-S-5PX-TR, Price=None, SnapEDA_Link=https://www.snapeda.com/parts/ECS-160-S-5PX-TR/ECS%20Inc./view-part/2457269/?ref=snap

## Nets (pads, with @x,y where several pads share a name; then routed paths per layer and width w, separated by ;. In a path a pad name is that pad's centre, name@x,y a point inside that pad or via, vN(x,y) a via of type N, cw(c..) or ccw(c..) an arc to the next point about the centre after c; other vN are vias at no path point)
+5V: C6.2 C7.2 C12.1 C13.1 C14.1 J2.1 J6.2 L1.2 R5.2 R6.2 R7.2 U1.6 U2.4 U2.6 U2.18 U3.4 U3.20 U4.15
+12V: C2.2 C3.2 C4.2 C5.2 C16.2 C17.2 C18.1 C19.2 J3.1 U1.2 U4.22 U4.28
D+: J4.3 U3.15
D-: J4.2 U3.16
GND: C2.1 C3.1 C4.1 C5.1 C6.1 C7.1 C8.1 C9.1 C10.2 C12.2 C13.2 C14.2 C15.1 C16.1 C17.1 C18.2 C21.2 D1.2 J2.4 J3.2 J4.5 J4.6 J4.7 J4.8 J4.9 J6.3 R4.1 R8.1 R9.1 R10.1 R11.1 R12.1 SW1.4 U1.4 U2.3 U2.5 U2.21 U3.7 U3.18 U3.21 U3.25 U3.26 U4.3 U4.18 U4.29
MISO: J5.2 U2.16
MOSI: J5.3 U2.15
NetC1_1: C1.1 U1.3
NetC1_2: C1.2 D1.1 L1.1 U1.1
NetC10_1: C10.1 U2.20
NetC11_1: C11.1 U3.2
NetC15_2: C15.2 U3.17
NetC19_1: C19.1 U4.6
NetC20_1: C20.1 U4.4
NetC20_2: C20.2 U4.5
NetC21_1: C21.1 U4.8
NetJ1_1: J1.1 U4.24
NetJ1_2: J1.2 U4.21
NetJ1_3: J1.3 U4.26
NetJ1_4: J1.4 U4.1
NetJ2_2: J2.2 U2.32
NetJ2_3: J2.3 U2.1
NetJ4_1: J4.1 R3.2
NetR1_2: R1.2 U2.30
NetR2_2: R2.2 U2.31
NetR6_1: R6.1 U4.12 U4.14
NetR7_1: R7.1 R8.3
NetR8_2: R8.2 U4.17
NetR9_2: R9.2 U4.27
NetR10_2: R10.2 U4.23
NetR11_2: R11.2 U4.13
NetR12_2: R12.2 U4.2
NetU2_9: U2.9 U4.19
NetU2_10: U2.10 U4.16
NetU2_11: U2.11 U4.11
NetU2_12: U2.12 U4.10
NetU2_13: U2.13 U4.9
RESET: R3.1 R4.2 U3.19
RST: C11.2 J6.1 R5.1 SW1.1 U2.29
RX: R1.1 U3.1
SCK: J5.1 U2.17
TX: R2.1 U3.5
XTAL1: C8.2 U2.7 Y1.1
XTAL2: C9.2 U2.8 Y1.2
pads on no net: J1.5 J1.6 J2.5 J2.6 J3.3 J3.4 J4.4 SW1.2 SW1.3 U1.5 U1.7 U1.8 U2.2 U2.14 U2.19 U2.22 U2.23 U2.24 U2.25 U2.26 U2.27 U2.28 U3.3 U3.6 U3.8 U3.9 U3.10 U3.11 U3.12 U3.13 U3.14 U3.22 U3.23 U3.24 U3.27 U3.28 U4.7 U4.20 U4.25

## Text inside footprints (layer, text, board x,y; h text height)
J4: Mechanical 1 "PCB EDGE" at 10395,1070 h35.43 r90